# Altium PCB Projekt_Pcb.PcbDoc
Units mm, origin at the board's own origin, x right, y up, seen from the top; angles counter-clockwise.
Board outline 36 x 35 mm, 3 copper layers (Top Layer, GroundPanel, Bottom Layer), stack 0.427 mm thick; 39 components, 31 nets, 164 pads, 44 vias.
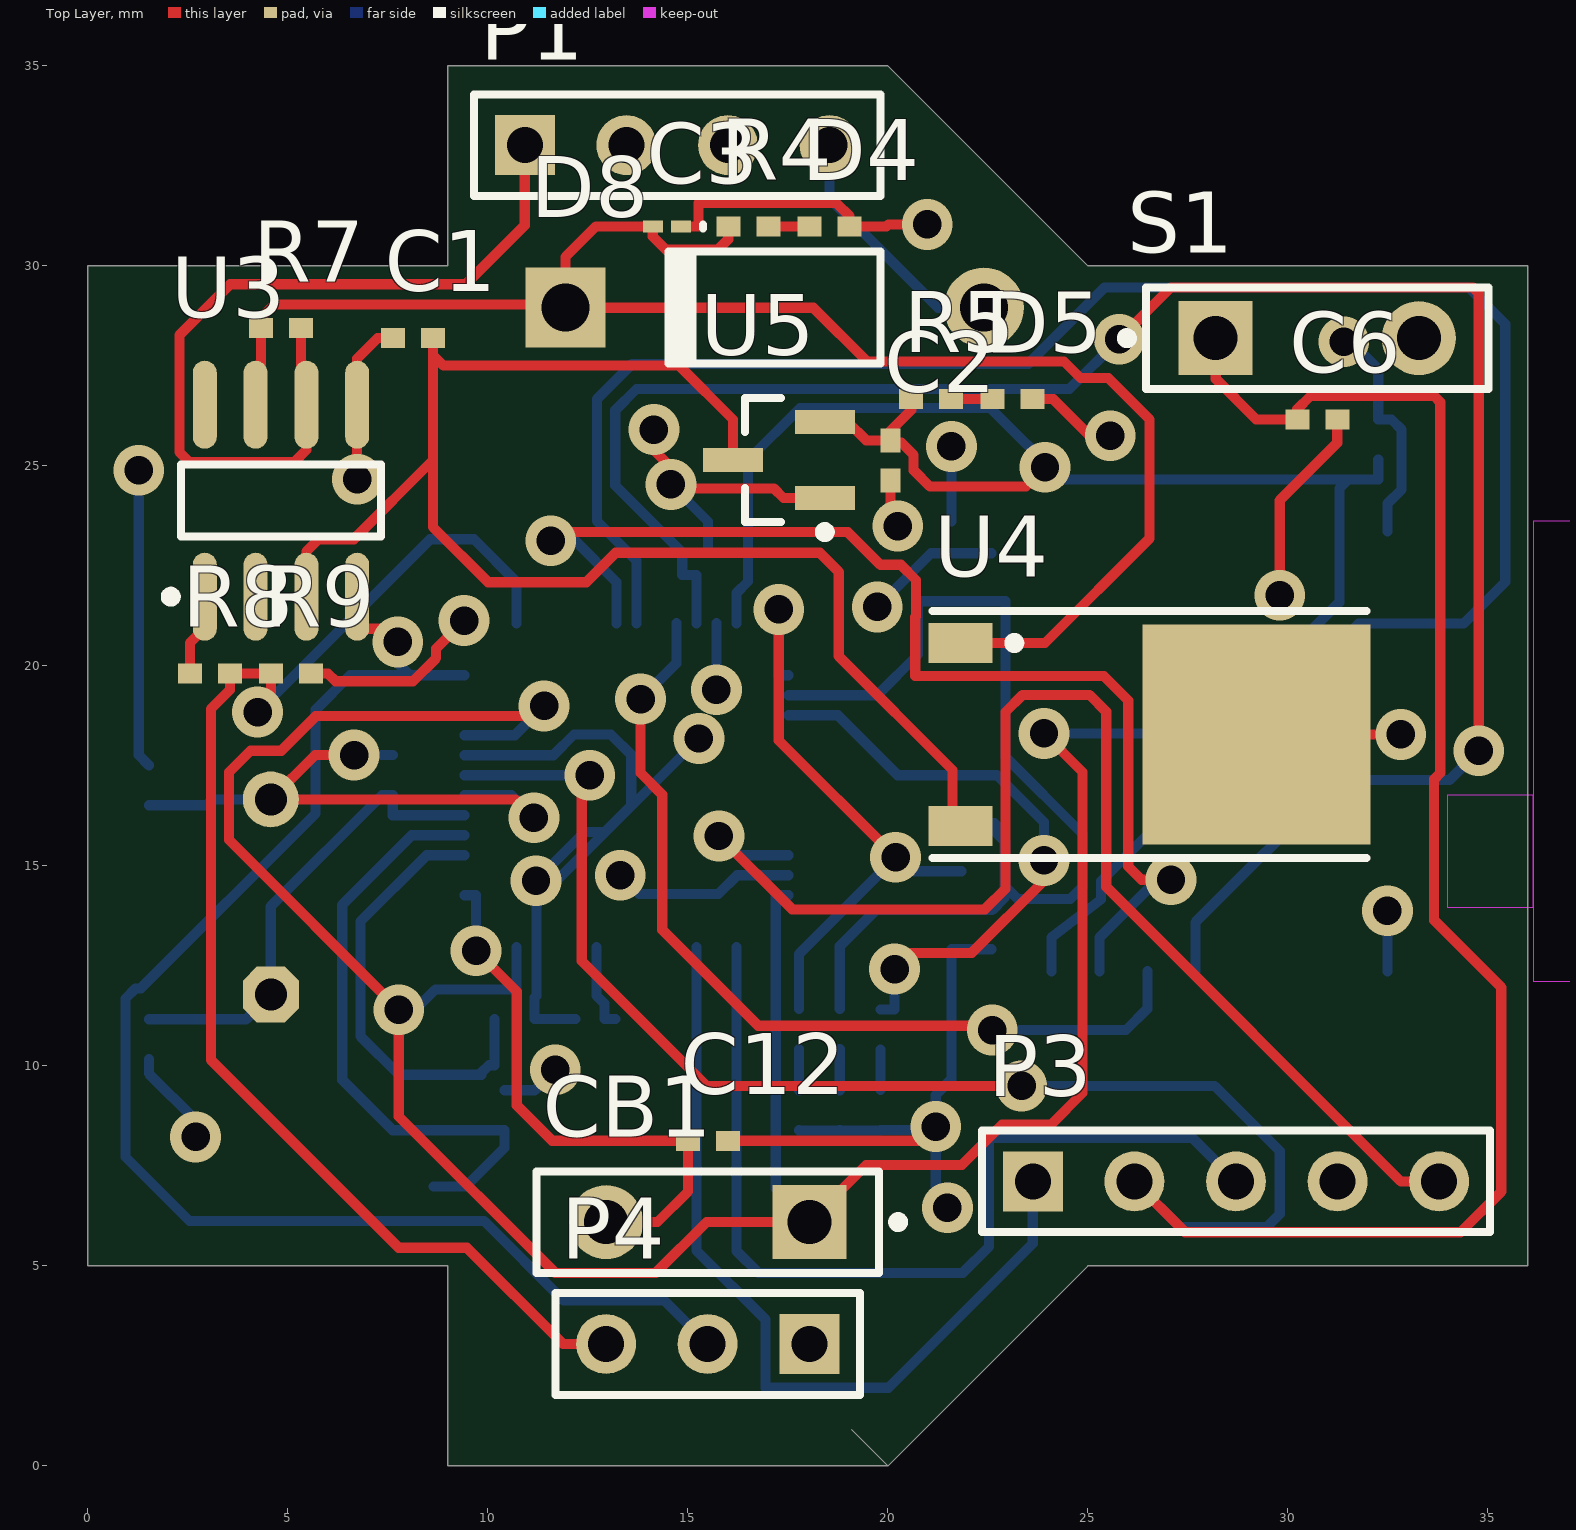
[diagram p0: Top Layer view]
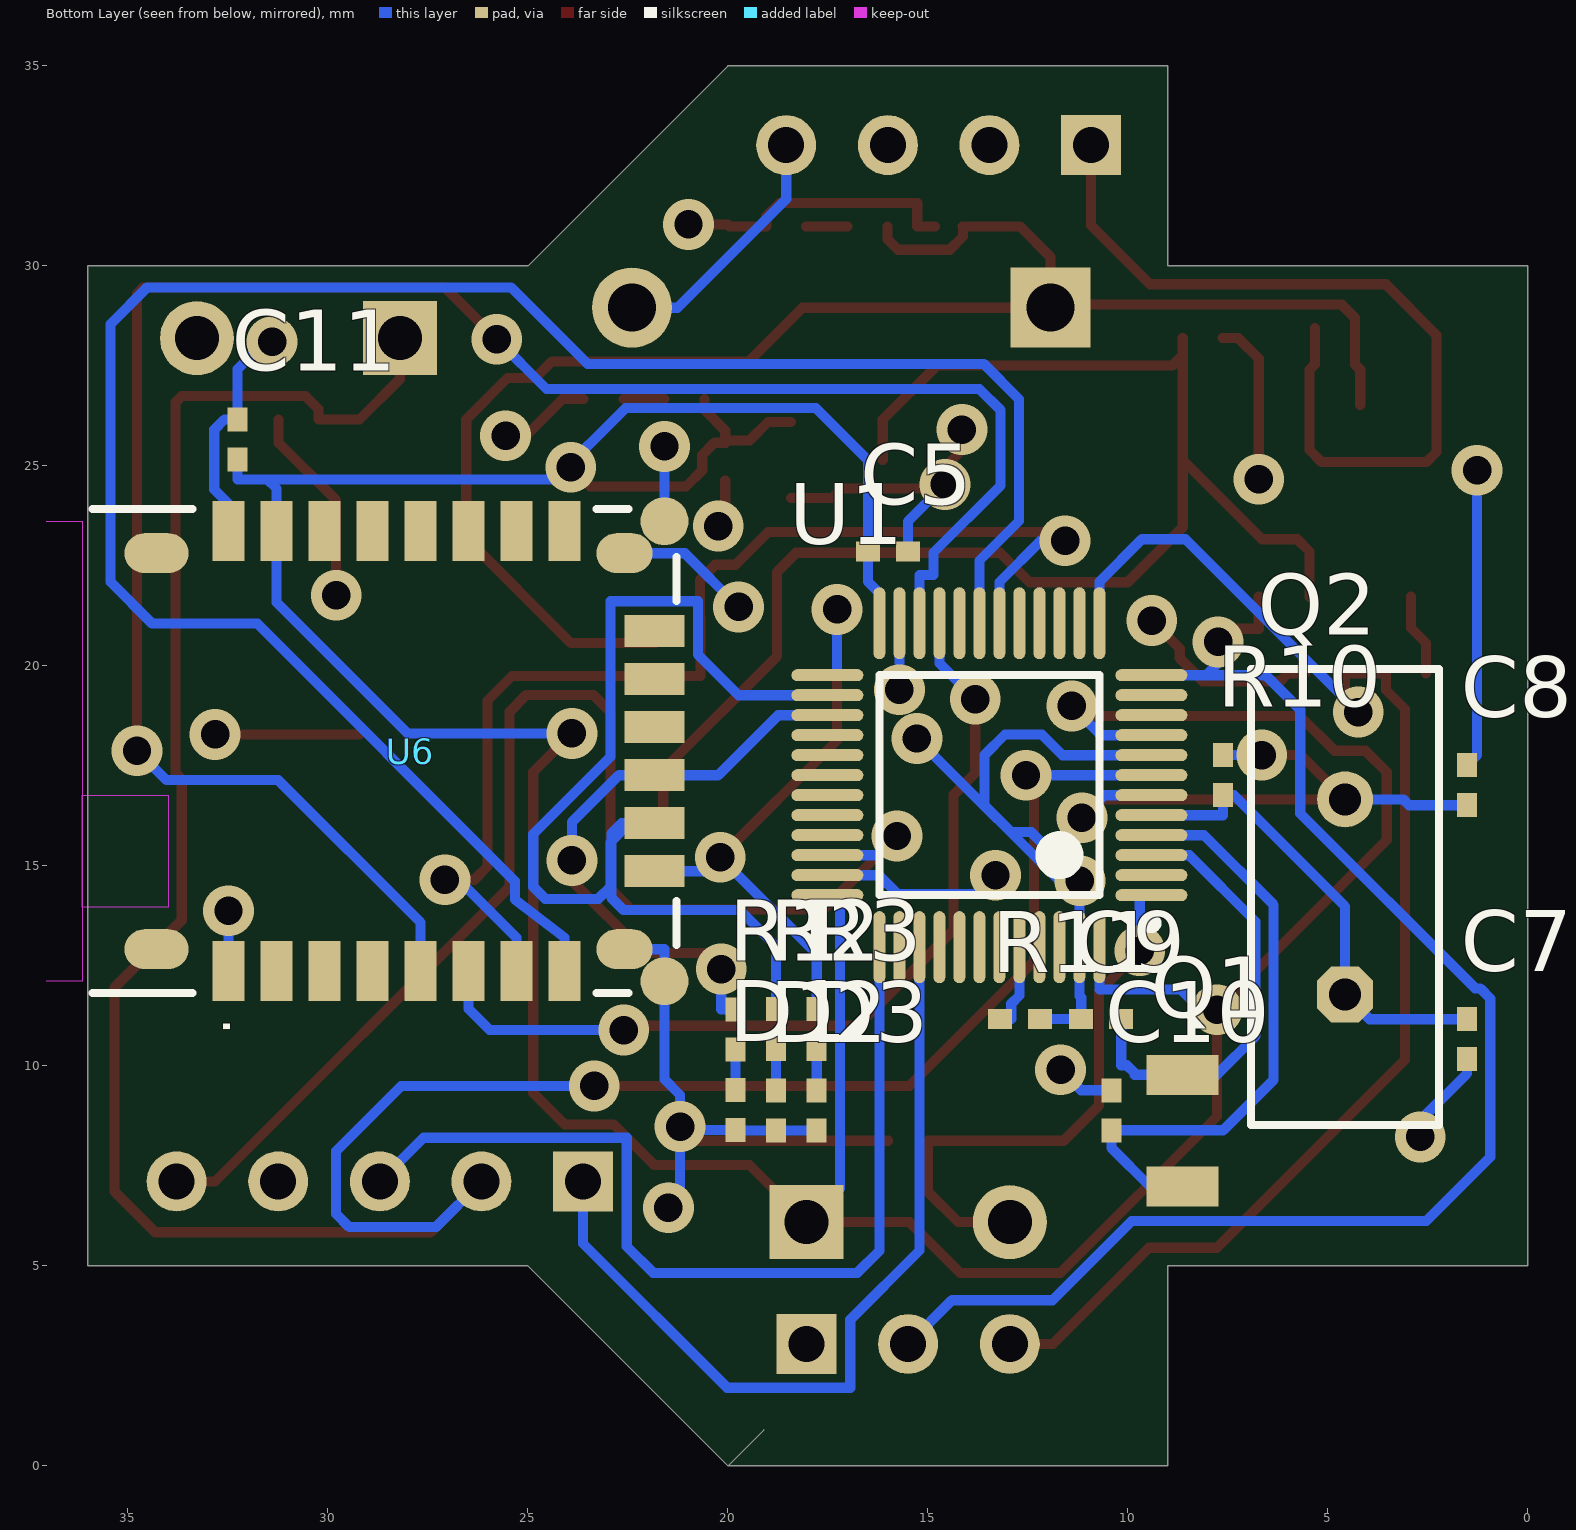
[diagram p1: Bottom Layer view, seen from below]
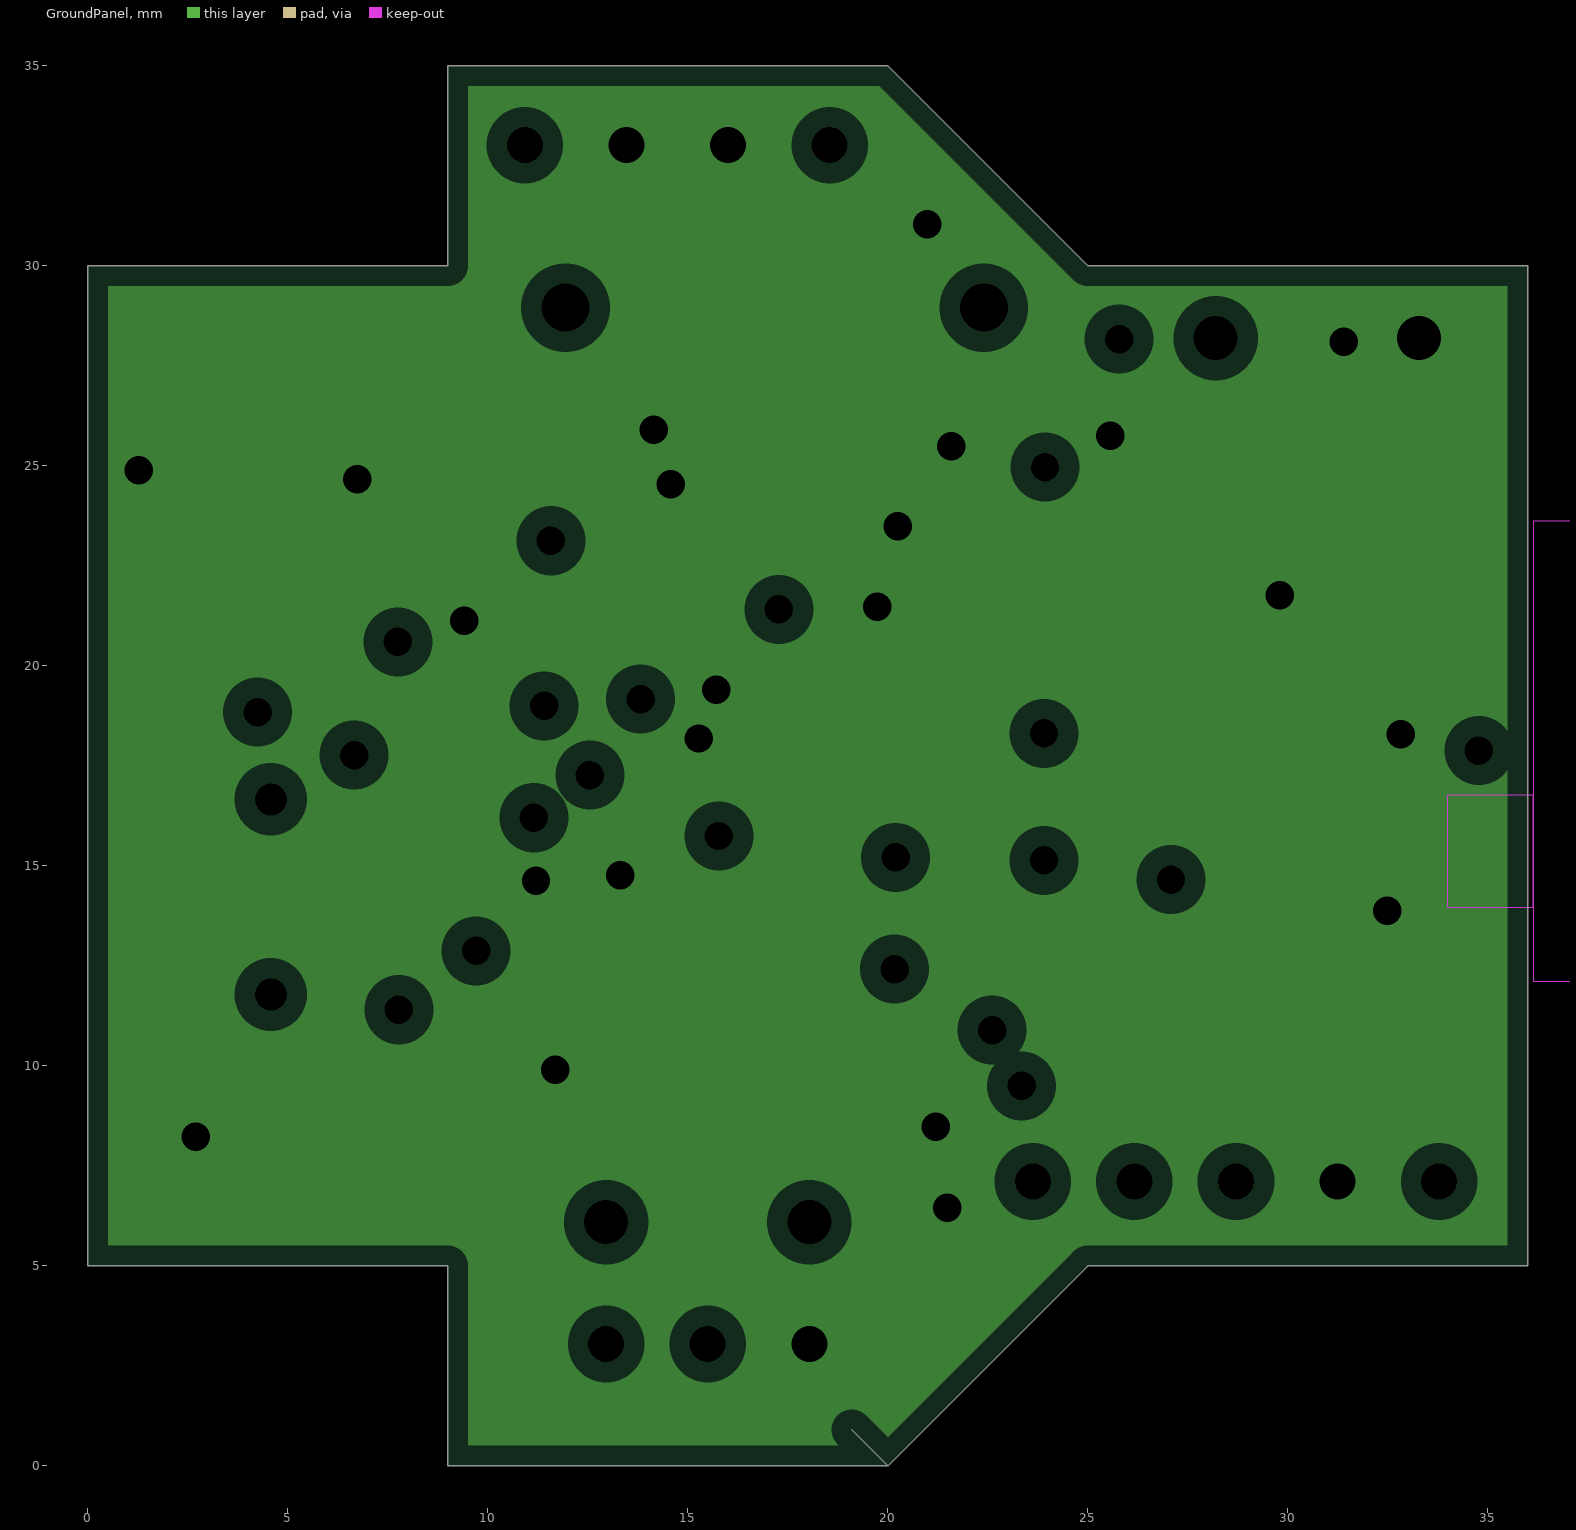
[diagram p2: GroundPanel, clearances drawn from the general rule]

## Layer stack, top to bottom
Top Solder: solder mask 0.0102, Solder Resist, Dk 3.5
Top Layer: signal copper 0.0356
GroundPanel: plane copper 0.036, net GND
Dielectric1: dielectric 0.32, FR-4, Dk 4.8
Bottom Layer: signal copper 0.0356
Bottom Solder: solder mask 0.0102, Solder Resist, Dk 3.5

## Board outline
9,0 9,5 0,5 0,30 9,30 9,35 20,35 25,30 36,30 36,5 25,5 20,0 19.1,0.9 20,0

## Design rules (kind name [scope] priority, off if disabled: settings)
Clearance [All] p1: gap=0.2 ignorepadtopadclearanceinfootprint=TRUE except(0: Arc-Hole Track-Hole SMDPad-Hole THPad-Hole Via-Hole Fill-Hole Poly-Hole Region-Hole Text-Hole)
FabricationTestPointUsage TestPointUsage [All] p1: valid=0 allowmultiple=FALSE
FabricationTestpoint Testpoint [All] p1: side=3 testpointundercomponent=TRUE minsize=1.016 maxsize=2.54 preferedsize=1.524 minholesize=0 maxholesize=1.016 preferedholesize=0.813 testpointgrid=0.025 allowsidetop=TRUE allowsidebottom=TRUE usegrid=TRUE gridtolerance=0
PlaneClearance [All] p1: clearance=0.508
PlaneConnect [All] p1: planeconnectstyle=Relief reliefexpansion=0.508 reliefentries=4 reliefconductorwidth=0.254 reliefairgap=0.254
PolygonConnect [All] p1: connectstyle=Relief reliefconductorwidth=0.254 reliefentries=4 polygonreliefangle="90 Angle" airgapwidth=0.254
RoutingVias [All] p1: holewidth=0.711 width=1.27 viastyle="Through Hole" minholewidth=0.711 minwidth=1.27 maxholewidth=0.711 maxwidth=1.27
SMDNeckDown [All] p1: percent=100.000
SilkToSolderMaskClearance SilkscreenOverComponentPads [IsPad] p1: minsilkscreentomaskgap=0.254 clearancetoexposedcopper=TRUE
SolderMaskExpansion [All] p1: expansion=0.102
Width [All] p1: maxlimit=0.254 minlimit=0.254 preferedwidth=0.254
25 further rules are at their usual default settings.

## Components (designator, comment, footprint, x,y, rotation, side; value= is the part's Value field where it differs from the comment)
C1 "1u" 0402 8.128,28.194 r0 top
C2 "1u" 0402 20.066,25.138 r90 top
C3 "1u" 0603 14.478,30.988 r180 top
C5 "100n" 0402 16.002,22.86 r0 bottom
C6 "100n" 0402 30.734,26.162 r180 top
C7 "22p" 0402 1.524,10.668 r270 bottom
C8 "22p" 0402 1.524,17.018 r90 bottom
C9 "10p" 0402 10.668,11.176 r180 bottom
C10 "10p" 0402 10.414,8.89 r270 bottom
C11 "4.7uF" 0402 32.258,25.662 r90 bottom
C12 "1u" 0402 15.502,8.128 r180 top
CB1 "Circuit Breaker" SPST-2 15.494,6.096 r180 top
D1 "Red" 0402 19.812,8.898 r270 bottom
D2 "Red" 0402 18.796,8.89 r270 bottom
D3 "Red" 0402 17.78,8.89 r270 bottom
D4 "Red" 0402 18.542,30.988 r0 top
D5 "Red" 0402 23.114,26.67 r0 top
D8 "Diode 1N4007" DO-41 17.168,28.956 r180 top
P1 "Header 4" HDR1X4 10.922,33.02 r0 top
P3 "Header 5" HDR1X5 23.622,7.112 r0 top
P4 "Header 3" HDR1X3 18.034,3.048 r180 top
Q1 "32.768kHz" Kwarc 8.636,8.382 r270 bottom
Q2 "8MHz" HC-49U 4.572,14.224 r90 bottom
R1 "330" 0402 19.812,10.914 r90 bottom
R2 "330" 0402 18.796,10.922 r90 bottom
R3 "330" 0402 17.78,10.922 r90 bottom
R4 "330" 0402 16.51,30.988 r180 top
R5 "330" 0402 21.082,26.67 r180 top
R7 "510" 0402 4.826,28.448 r0 top
R8 "12k" 0402 3.048,19.812 r180 top
R9 "22k" 0402 5.08,19.812 r180 top
R10 "1M" 0402 7.62,17.272 r270 bottom
R11 "10k" 0402 12.692,11.176 r180 bottom
S1 "SW-PB" SPST-2 30.734,28.194 r0 top
U1 "STM32F103CBT6" LQFP48_N 13.462,17.018 r0 bottom
U3 "L9637D" SO8_N 4.826,24.13 r90 top
U4 "MC78M05BDTRK" 369A-13 25.51,18.288 r270 top
U5 "MCP1703T-3302E/CB" SOT-23A-CB3_N 17.272,25.146 r180 top
U6 "RN4020-V/RM" RN4020_ALT 32.486,12.368 r90 bottom

## Footprints (in the part's own frame and the unit in brackets; to place one, negate y for a bottom-side part, rotate by r counter-clockwise, add the part's x,y. Pads: shape width x height; smd on the part's side, far side on the other; paste and mask are expansions set on the pad)
369A-13 [mm] "D-PAK/TO-252-AA; 3 Leads (1 Cropped); Body 10.3 (inc. leads) x 6.7 mm (LxW max)"
  rect 1x1.6 smd: 1(-2.285,-3.7) 3(2.285,-3.7)
  rect 5.5x5.7 smd: 4(0,3.7)
  silkscreen extent -3.08,-4.4 3.08,6.45
0402 [mm] "Chip Capacitor, Body 1.0x0.5mm, IPC High Density"
  rect 0.6x0.5 smd: 1(-0.5,0) 2(0.5,0)
  body extent -0.55,-0.3 0.55,0.3, height 1.3
0603 [mm] "Chip Inductor, Body 0.6x0.3mm, IPC High Density"
  rect 0.5x0.3 smd: 1(-0.35,0) 2(0.35,0)
  silkscreen extent -0.9,-0.05 -0.9,0.05, body extent -0.33,-0.18 0.33,0.18, height 0.55
DO-41 [mm] "Diode, Axial; Body 5.2 x 2.7 mm (LxDia. max), Lead Dia. 0.86 mm (max)"
  round 2 hole 1.2: 1(-5.23,0)
  rect 2x2 hole 1.2: 2(5.23,0)
  silkscreen extent -2.65,-1.4 2.75,1.4
HC-49U [mm] "Quartz Crystal, Thru-Hole; 2 Leads; Body 11.35 x 4.65 x 13.46 mm (LxWxH max)"
  oct 1.4x1.4 hole 0.8: 1(-2.44,0)
  round 1.4 hole 0.8: 2(2.44,0)
  silkscreen extent -5.7,-2.35 5.7,2.35
HDR1X3 [mm] "Connector; Header; 3 Position"
  rect 1.5x1.5 hole 0.9: 1(0,0)
  round 1.5 hole 0.9: 2(2.54,0) 3(5.08,0)
  silkscreen extent -1.27,-1.27 6.35,1.27
HDR1X4 [mm] "Connector; Header; 4 Position"
  rect 1.5x1.5 hole 0.9: 1(0,0)
  round 1.5 hole 0.9: 2(2.54,0) 3(5.08,0) 4(7.62,0)
  silkscreen extent -1.27,-1.27 8.89,1.27
HDR1X5 [mm] "Connector; Header; 5 Position"
  rect 1.5x1.5 hole 0.9: 1(0,0)
  round 1.5 hole 0.9: 2(2.54,0) 3(5.08,0) 4(7.62,0) 5(10.16,0)
  silkscreen extent -1.27,-1.27 11.43,1.27
Kwarc [mm] "Chip Inductor, Body 3.2x1.5mm, IPC High Density"
  rect 1x1.8 smd: 1(-1.397,0) 2(1.397,0)
  body extent -1.7,-0.9 1.7,0.9, height 0.55
LQFP48_N [mm] "Thin QFP, 48-Leads, Body 7x7mm, Pitch 0.5mm, IPC Medium Density"
  oval 1.8x0.3 smd: 1(-4.05,2.75) 2(-4.05,2.25) 3(-4.05,1.75) 4(-4.05,1.25) 5(-4.05,0.75) 6(-4.05,0.25) 7(-4.05,-0.25) 8(-4.05,-0.75) 9(-4.05,-1.25) 10(-4.05,-1.75) 11(-4.05,-2.25) 12(-4.05,-2.75) 25(4.05,-2.75) 26(4.05,-2.25) 27(4.05,-1.75) 28(4.05,-1.25) 29(4.05,-0.75) 30(4.05,-0.25) 31(4.05,0.25) 32(4.05,0.75) 33(4.05,1.25) 34(4.05,1.75) 35(4.05,2.25) 36(4.05,2.75)
  oval 0.3x1.8 smd: 13(-2.75,-4.05) 14(-2.25,-4.05) 15(-1.75,-4.05) 16(-1.25,-4.05) 17(-0.75,-4.05) 18(-0.25,-4.05) 19(0.25,-4.05) 20(0.75,-4.05) 21(1.25,-4.05) 22(1.75,-4.05) 23(2.25,-4.05) 24(2.75,-4.05) 37(2.75,4.05) 38(2.25,4.05) 39(1.75,4.05) 40(1.25,4.05) 41(0.75,4.05) 42(0.25,4.05) 43(-0.25,4.05) 44(-0.75,4.05) 45(-1.25,4.05) 46(-1.75,4.05) 47(-2.25,4.05) 48(-2.75,4.05)
  silkscreen extent -4.17,-2.75 2.75,3.57, body extent -3.5,-3.5 3.5,3.5, height 1.6
RN4020_ALT [mm] "Bluetooth BLE Module - Microchip"
  rect 1.5x0.8 smd: 1(0,0) 2(0,-1.2) 3(0,-2.4) 4(0,-3.6) 5(0,-4.8) 6(0,-6) 7(0,-7.2) 8(0,-8.4) 17(11,-8.4) 18(11,-7.2) 19(11,-6) 20(11,-4.8) 21(11,-3.6) 22(11,-2.4) 23(11,-1.2) 24(11,0)
  oval 1x1.6 smd: 1A(0.55,1.8) 24A(10.45,1.8)
  round 1.2 smd: 9(-0.25,-10.9) 16(11.25,-10.9)
  oval 1x1.4 smd: 9(0.55,-9.9) 16(10.45,-9.9)
  rect 0.8x1.5 smd: 10(2.5,-10.65) 11(3.7,-10.65) 12(4.9,-10.65) 13(6.1,-10.65) 14(7.3,-10.65) 15(8.5,-10.65)
  Keep-Out Layer region: 1.6,3.65 4.4,3.65 4.4,1.5 1.6,1.5
  Keep-Out Layer region: -0.25,8.6 11.25,8.6 11.25,3.65 -0.25,3.65
  silkscreen extent -0.55,-11.2 11.55,3.4, body extent -0.25,-10.9 11.25,8.6, height 2.3
SO8_N [mm] "SOIC, 8-Leads, Body 4.9x3.9mm, Pitch 1.27mm, IPC Medium Density"
  oval 2.2x0.6 smd: 1(-2.4,1.905) 2(-2.4,0.635) 3(-2.4,-0.635) 4(-2.4,-1.905) 5(2.4,-1.905) 6(2.4,-0.635) 7(2.4,0.635) 8(2.4,1.905)
  silkscreen extent -2.52,-2.5 0.9,2.88, body extent -1.95,-2.45 1.95,2.45, height 1.75
SOT-23A-CB3_N [mm] "SOT346, 3-Leads, Body 2.9x1.5mm, Pitch 0.95mm, Lead Span 2.6mm, IPC Medium Density"
  rect 1.5x0.6 smd: 1(-1.15,0.95) 2(-1.15,-0.95) 3(1.15,0)
  silkscreen extent -1.28,-1.55 0.85,1.92, body extent -0.85,-1.55 0.85,1.55, height 1.45
SPST-2 [mm] "Switch; 2 Leads"
  rect 1.85x1.85 hole 1.1: 1(-2.54,0)
  round 1.85 hole 1.1: 2(2.54,0)
  silkscreen extent -4.89,-1.27 4.28,1.27

## Part data
C1 C2 C3 C5 C6 C7 C8 C9 C10 C11 C12: library part Cap, "Capacitor", LatestRevisionDate=17-Jul-2002, LatestRevisionNote="Re-released for DXP Platform.", PackageDescription="Radial Cap, Thru-Hole; 2 Leads; 0.3 in Pin Spacing", PackageReference=RAD-0.3, Published=8-Jun-2000, Publisher="Altium Limited"
D1 D2 D3 D4 D5: library part LED2, "Typical RED, GREEN, YELLOW, AMBER GaAs LED", LatestRevisionDate=17-Jul-2002, LatestRevisionNote="Re-released for DXP Platform.", PackageDescription="SM LED; 2 Flat Leads", PackageReference=3.2X1.6X1.1, PackageVersion=Feb-2002, Published=8-Jun-2000, Publisher="Altium Limited"
D8: "1 Amp General Purpose Rectifier", Code_JEDEC=DO-204-AL, ComponentLink1Description="Manufacturer Link", ComponentLink1URL=http://www.fairchildsemi.com/, ComponentLink2Description=Datasheet, ComponentLink2URL=http://www.fairchildsemi.com/ds/1N%2F1N4001.pdf, DatasheetVersion=1998, LatestRevisionDate=17-Jul-2002, LatestRevisionNote="Re-released for DXP Platform.", PackageDescription="Diode, Axial; Body 5.2 x 2.7 mm (LxDia. max), Lead Dia. 0.86 mm (max)", PackageReference=DO-41, PackageVersion=Aug-1999, Published=8-Jun-2000, Publisher="Altium Limited"
P1: "Header, 4-Pin", LatestRevisionDate=17-Jul-2002, LatestRevisionNote="Re-released for DXP Platform.", Publisher="Altium Limited"
P3: "Header, 5-Pin", LatestRevisionDate=17-Jul-2002, LatestRevisionNote="Re-released for DXP Platform.", Publisher="Altium Limited"
P4: "Header, 3-Pin", LatestRevisionDate=17-Jul-2002, LatestRevisionNote="Re-released for DXP Platform.", Publisher="Altium Limited"
Q1: library part XTAL, "Crystal Oscillator", LatestRevisionDate=17-Jul-2002, LatestRevisionNote="Re-released for DXP Platform.", PackageDescription="Crystal, Thru-Hole; 2 Leads; Body 3.1 x 8.2 mm (Dia.xH)", PackageReference=R38, Published=8-Jun-2000, Publisher="Altium Limited"
Q2: library part ECS-10-13-1, "Crystal Oscillator", ComponentLink1Description="Manufacturer Link", ComponentLink1URL=http://www.ecsxtal.com/, ComponentLink2Description=Datasheet, ComponentLink2URL=http://www.ecsxtal.com/pdf2/HC49U.PDF, DatasheetDocument=18-Apr-2000, PackageReference=HC-49U, Published=17-Jul-2002, Publisher="Altium Limited"
R1 R2 R3 R4 R5 R7 R8 R9 R10 R11: library part Res2, "Resistor", LatestRevisionDate=17-Jul-2002, LatestRevisionNote="Re-released for DXP Platform.", PackageDescription="Axial Device, Thru-Hole; 2 Leads; 0.4 in Pin Spacing", PackageReference=AXIAL-0.4, Published=8-Jun-2000, Publisher="Altium Limited"
S1: "Switch", LatestRevisionDate=17-Jul-2002, LatestRevisionNote="Re-released for DXP Platform.", PackageDescription="Switch; 2 Leads", PackageReference=SPST-2, Published=24-Mar-1999, Publisher="Altium Limited"
U1: "STM32 ARM-based 32-bit MCU with 128 Kbytes Flash, 48-pin LQFP, Industrial Temperature", ComponentLink1Description="Manufacturer Link", ComponentLink1URL=www.st.com/stm32, ComponentLink2Description=Datasheet, ComponentLink2URL=http://www.st.com/stonline/products/literature/ds/13587.pdf, DatasheetVersion="rev6, Mar-2008", PackageDescription="48-Pin Low-Profile Quad Flat Pack, 7 x 7 mm Body, 0.5 mm Pitch (LQFP48)", PackageReference=LQFP48, PackageVersion=Mar-2008, Published=30-May-2008, Publisher="Altium Limited"
U3: "ISO 9141 Interface", Code_IPC=SOIC127P600-8, Code_JEDEC=MS-012-AA, ComponentLink1Description="Manufacturer Link", ComponentLink1URL=http://www.st.com/, ComponentLink2Description=Datasheet, ComponentLink2URL=http://www.st.com/stonline/products/literature/ds/1765/l9637.pdf, DatasheetVersion=Dec-1998, LatestRevisionDate=13-Apr-2006, LatestRevisionNote="IPC-7351 Footprint Added.", PackageDescription="8-Pin Small Outline Integrated Circuit 1.27 mm Pitch", PackageReference=SO8, PackageVersion=Dec-2002, Published=24-Aug-2001, Publisher="Altium Limited"
U4: "Three-Terminal Medium Current Positive Voltage Regulator", ComponentLink1Description="Manufacturer Link", ComponentLink1URL=http://www.onsemi.com/site/products/taxonomy/0,4438,503,00.html, ComponentLink2Description=Datasheet, ComponentLink2URL=http://www.onsemi.com/pub/Collateral/MC78M00-D.PDF, DatasheetVersion=Apr-2000, Note="Pin 2 is electrically connected to Pin 4; Pin 2 is trimmed and not drawn;", PackageDescription="D-PAK/TO-252-AA; 3 Leads (1 Cropped); Body 10.3 (inc. leads) x 6.7 mm (LxW max)", PackageReference=369A-13, PackageVersion=1997, Published=15-Apr-2002, Publisher="Altium Limited"
U5: "250 mA, 16V, Low Quiescent Current LDO Regulator, 3-Pin SOT-23A, Extended Temperature, Tape and Reel", Supplier Part Number 1=MCP1703T-3302E/CBTR-ND, ComponentLink1Description=Datasheet, ComponentLink1URL=http://ww1.microchip.com/downloads/en/DeviceDoc/22049d.pdf, ComponentLink2Description="Packaging Specification", ComponentLink2URL=http://www.microchip.com/stellent/groups/techpub_sg/documents/packagingspec/en012702.pdf, ComponentLink3Description="Microchip.com Home", ComponentLink3URL=http://www.microchip.com/, DatasheetVersion="revD, Sep-2009", PackageDescription="3-Lead Plastic Small Outline Transistor (CB) [SOT-23A]", PackageReference=SOT-23A-CB3, PackageVersion="revBB, Aug-2009", Published=29-Jan-2009, Publisher="Altium Limited", Supplier 1=Digi-Key, Supplier 2=Digi-Key, Supplier 3=Digi-Key, Supplier 4=Farnell, Supplier Part Number 2=MCP1703T-3302E/CBCT-ND, Supplier Part Number 3=MCP1703T-3302E/CBDKR-ND, Supplier Part Number 4=1439518
U6: library part RN2020-V/RM123, "Microchip RN4020 Bluetooth"
CB1: LatestRevisionDate=17-Jul-2002, LatestRevisionNote="Re-released for DXP Platform.", PackageDescription="Switch; 2 Leads", PackageReference=SPST-2, Published=24-Mar-1999, Publisher="Altium Limited"

## Via types
v1: diameter 1.27, hole 0.711, Top Layer to Bottom Layer, 44 vias

## Nets (pads, with @x,y where several pads share a name; then routed paths per layer and width w, separated by ;. In a path a pad name is that pad's centre, name@x,y a point inside that pad or via, vN(x,y) a via of type N, cw(c..) or ccw(c..) an arc to the next point about the centre after c; other vN are vias at no path point)
3.3V: C2.2 C5.2 C11.1 CB1.1 R5.2 U1.9 U1.24 U1.36 U1.48 U5.2 U6.23 | length 106.5
  Top Layer w0.254: v1(11.405,18.999) 11.151,18.745 5.697,18.745 4.833,17.881 4.064,17.881 3.531,17.348 3.531,15.646 v1(7.772,11.405) 7.772,8.738 11.684,4.826 14.199,4.826 15.469,6.096 CB1.1 19.46,7.522 21.844,7.522 22.857,8.534 24.079,8.534 24.867,9.322 24.867,17.348 v1(23.901,18.313) ; U5.2 18.999,26.096 19.457,25.638 C2.2 ; R5.2 20.582,26.399 20.066,25.883 C2.2 ; v1(23.927,24.968) 23.444,24.486 21.049,24.486 20.643,24.892 20.643,25.273 20.338,25.578 20.066,25.578 C2.2
  Bottom Layer w0.254: v1(7.772,11.405) 8.179,11.405 8.687,11.913 10.712,11.913 U1.48 ; U1.9 10.673,18.268 v1(11.405,18.999) ; U1.24 16.212,21.819 16.502,22.109 C5.2 16.502,25.146 17.806,26.45 22.555,26.45 v1@24.342,24.663 ; U1.36 17.196,14.268 17.196,6.934 CB1.1 ; v1(23.901,18.313) 28.009,18.313 31.286,21.59 U6.23 31.286,24.435 31.515,24.663 ; v1(23.927,24.968) 23.927,24.663 v1@24.342,24.663 ; C11.1 32.258,24.663 31.515,24.663 ; v1@24.342,24.663 31.515,24.663
12V: D8.1 P1.4 | length 6.3
  Bottom Layer w0.254: P1.4 18.542,31.674 21.26,28.956 D8.1
GND: C1.1 C2.1 C3.1 C5.1 C6.1 C7.2 C8.2 C9.1 C10.1 C11.2 C12.1 D1.2 D2.2 D3.2 D4.2 D5.2 P1.2 P1.3 P3.4 P4.1 R9.1 R11.2 S1.2 U1.8 U1.23 U1.35 U1.47 U3.5 U4.4 U5.1 U6.1 U6.9 U6.16 U6.24 | length 101.5
  Top Layer w0.254: R9.1 5.998,19.812 6.192,19.618 8.128,19.618 8.704,20.194 8.704,20.434 v1(9.403,21.133) ; v1(6.731,24.668) U3.5 6.731,27.686 7.239,28.194 C1.1 ; v1(14.149,25.908) 14.149,25.4 15.111,24.438 17.147,24.438 17.389,24.196 U5.1 ; C3.1 15.265,30.988 15.265,31.572 18.712,31.572 19.042,31.242 D4.2 19.962,30.988 20.013,31.039 v1(20.985,31.039) ; C12.1 20.841,8.128 v1(21.197,8.484) ; C2.1 20.066,23.673 v1(20.244,23.495) ; D5.2 24.135,26.67 25.049,25.756 v1(25.557,25.756) ; U4.4 v1(32.822,18.288) ; v1(29.794,21.768) 29.794,24.138 31.234,25.578 C6.1
  Bottom Layer w0.254: v1(1.27,24.892) 1.27,17.772 C8.2 ; C7.2 1.524,9.807 2.692,8.638 v1(2.692,8.225) ; U1.8 11.636,17.768 12.153,18.285 13.075,18.285 13.583,17.777 13.583,16.51 12.917,15.844 12.415,15.844 v1(11.201,14.63) ; C10.1 11.168,9.39 v1(11.684,9.906) ; R11.2 C9.1 11.168,11.709 11.212,11.753 U1.47 11.212,14.122 v1(15.276,18.186) ; v1(13.31,14.768) 13.782,14.296 15.758,14.296 16.23,14.768 U1.35 ; v1(14.575,24.536) 15.502,23.609 C5.1 ; v1(15.712,19.406) U1.23 ; D3.2 17.78,8.382 D2.2@18.796,8.382 ; D2.2 D2.2@18.796,8.382 ; v1(19.735,21.475) 21.078,22.818 U6.16@22.586,22.818 ; v1@21.488,6.963 v1(21.488,6.455) 21.197,6.746 v1(21.197,8.484) ; U6.16@21.586,23.618 v1(21.586,25.488) ; U6.9@22.586,12.918 21.586,12.918 21.586,12.118 21.586,9.664 21.197,9.275 v1(21.197,8.484) ; v1(31.394,28.105) 31.578,28.105 32.258,27.425 C11.2 32.588,26.162 32.842,25.908 32.842,24.41 32.486,24.054 U6.24 ; U6.1 v1(32.486,13.88) ; D2.2@18.796,8.382 19.812,8.382 D1.2 21.111,8.398 v1(21.197,8.484)
"ISO9141-2 K": P1.1 R7.2 U3.6 | length 21.2
  Top Layer w0.254: R7.2 5.326,27.542 5.461,27.407 U3.6 5.461,25.4 5.156,25.095 2.54,25.095 2.286,25.349 2.286,28.27 3.556,29.54 9.449,29.54 10.922,31.013 P1.1
NetC1_2: C1.2 U3.3 U4.3 U5.3 | length 38.1
  Top Layer w0.254: U3.3 5.461,22.86 5.766,23.165 6.647,23.165 8.628,25.146 ; C1.2 8.628,27.77 ; U5.3 16.129,25.146 16.129,26.162 14.783,27.508 8.89,27.508 8.628,27.77 ; U4.3 21.615,16.003 21.615,17.4 18.771,20.245 18.771,22.352 18.294,22.828 13.197,22.828 12.459,22.09 10.007,22.09 8.628,23.47 8.628,25.146 ; 8.628,25.146 8.628,27.77
NetC3_2: C3.2 D8.2 R4.2 R7.1 U3.7 U4.1 | length 41
  Top Layer w0.254: U3.7 4.191,27.407 4.326,27.542 R7.1 4.326,28.702 4.656,29.032 D8.2@11.938,29.032 ; C3.2 C3.2@14.122,30.988 ; R4.2 16.01,30.666 15.748,30.404 14.453,30.404 14.122,30.734 C3.2@14.122,30.988 ; U4.1 23.927,20.573 26.543,23.189 26.543,26.162 25.509,27.196 24.815,27.196 24.401,27.61 19.482,27.61 18.136,28.956 D8.2 D8.2@11.938,29.032 ; D8.2@11.938,29.032 11.938,30.226 12.7,30.988 C3.2@14.122,30.988
NetC7_1: C7.1 Q2.1 R10.2 U1.5 | length 12
  Bottom Layer w0.254: C7.1 3.956,11.168 Q2.1 4.572,13.989 7.355,16.772 R10.2 7.62,16.268 U1.5
NetC8_1: C8.1 Q2.2 R10.1 U1.6 | length 15.4
  Top Layer w0.254: v1(6.655,17.772) 5.68,17.772 Q2.2 10.692,16.664 v1(11.151,16.205)
  Bottom Layer w0.254: C8.1 2.972,16.518 3.118,16.664 Q2.2 ; v1(6.655,17.772) R10.1 ; U1.6 10.588,16.768 v1(11.151,16.205)
NetC9_2: C9.2 Q1.1 U1.3 | length 11.2
  Bottom Layer w0.254: U1.3 8.467,15.268 6.81,13.611 6.81,10.744 7.776,9.779 Q1.1 9.837,9.779 9.837,9.825 10.029,10.017 10.168,10.017 C9.2
NetC10_2: C10.2 Q1.2 U1.4 | length 15.3
  Bottom Layer w0.254: Q1.2 9.449,6.985 10.414,7.95 C10.2 7.62,8.39 6.356,9.654 6.356,14.027 8.097,15.768 U1.4
NetC12_2: C12.2 CB1.2 U1.1 | length 14.2
  Top Layer w0.254: v1(9.703,12.878) 10.719,11.862 10.719,9.017 11.608,8.128 C12.2 15.002,6.858 14.24,6.096 CB1.2
  Bottom Layer w0.254: U1.1 9.703,14.268 v1(9.703,12.878)
NetD1_1: D1.1 R1.1 | length 1
  Bottom Layer w0.254: D1.1 R1.1
NetD2_1: D2.1 R2.1 | length 1
  Bottom Layer w0.254: D2.1 R2.1
NetD3_1: D3.1 R3.1 | length 1
  Bottom Layer w0.254: D3.1 R3.1
NetD4_1: D4.1 R4.1 | length 1
  Top Layer w0.254: R4.1 D4.1
NetD5_1: D5.1 R5.1 | length 1
  Top Layer w0.254: R5.1 D5.1
NetP3_1: P3.1 U1.39 | length 21.5
  Bottom Layer w0.254: U1.39 15.212,5.387 16.942,3.658 16.942,1.956 20.015,1.956 23.622,5.563 P3.1
NetP4_2: P4.2 U1.12 U3.4 | length 36.7
  Top Layer w0.254: U3.4 6.731,20.93 7.417,20.93 v1(7.747,20.599)
  Bottom Layer w0.254: v1(7.747,20.599) 7.747,20.066 8.045,19.768 ; U1.12 8.045,19.768 ; P4.2 14.402,4.14 11.887,4.14 9.906,6.121 2.54,6.121 0.94,7.722 0.94,11.684 1.194,11.938 1.321,11.938 5.693,16.31 5.693,18.908 6.553,19.768 8.045,19.768
NetP4_3: P4.3 R8.1 R9.2 U1.13 | length 34.6
  Top Layer w0.254: v1(4.242,18.847) 4.58,19.185 R9.2 R8.1 3.548,19.398 3.073,18.923 3.073,10.153 7.772,5.454 9.474,5.454 11.88,3.048 P4.3
  Bottom Layer w0.254: v1(4.242,18.847) 8.56,23.165 9.652,23.165 10.712,22.105 U1.13
NetR8_2: R8.2 U3.1 | length 2.1
  Top Layer w0.254: R8.2 2.548,20.574 2.921,20.947 U3.1
NetR11_1: R11.1 U1.44 | length 2.2
  Bottom Layer w0.254: U1.44 12.712,11.76 12.915,11.557 12.915,11.176 R11.1
NetU1_18: U1.18 U6.7 | length 29.4
  Top Layer w0.254: v1(11.572,23.129) 11.788,23.345 18.997,23.345 19.812,22.53 20.32,22.53 20.701,22.149 20.701,21.234 20.683,21.216 20.683,19.746 25.399,19.746 26.01,19.135 26.01,14.986 26.34,14.656 v1(27.076,14.656)
  Bottom Layer w0.254: v1(11.572,23.129) 12.181,23.129 13.212,22.098 U1.18 ; U6.7 25.286,13.208 26.734,14.656 v1(27.076,14.656)
NetU1_19: U1.19 U6.8 | length 52.8
  Bottom Layer w0.254: U1.19 13.712,22.635 12.725,23.622 12.725,26.67 13.605,27.55 23.509,27.55 25.423,29.464 34.519,29.464 35.433,28.55 35.433,22.098 34.392,21.057 31.763,21.057 25.327,14.621 25.327,14.157 24.086,13.208 U6.8
NRST: C6.2 P3.2 S1.1 U1.7 | length 71.2
  Top Layer w0.254: v1(12.548,17.268) 12.344,17.065 12.344,12.624 15.469,9.5 v1(23.343,9.5) ; P3.2 27.432,5.842 34.315,5.842 35.331,6.858 35.331,11.963 33.655,13.64 33.655,17.17 33.807,17.323 33.807,26.594 33.655,26.746 30.564,26.746 30.234,26.416 C6.2 29.21,26.162 28.194,27.178 S1.1
  Bottom Layer w0.254: U1.7 v1(12.548,17.268) ; v1(23.343,9.5) 28.169,9.5 29.794,7.874 29.794,6.299 29.464,5.969 27.305,5.969 P3.2
PIO1: R3.2 U1.25 U6.10 | length 16.1
  Top Layer w0.254: v1(17.272,21.412) 17.272,18.136 v1(20.193,15.215)
  Bottom Layer w0.254: v1(17.272,21.412) 17.272,19.768 U1.25 ; R3.2 17.78,12.802 v1@19.846,14.868 ; v1(20.193,15.215) v1@19.846,14.868 ; U6.10 v1@19.846,14.868
PIO2: R2.2 U1.26 U6.11 | length 28.1
  Bottom Layer w0.254: U1.26 19.736,19.268 20.752,20.284 20.752,21.615 22.936,21.615 22.936,17.729 24.867,15.799 24.867,14.478 24.565,14.176 23.238,14.176 22.937,14.478 22.937,15.598 22.914,15.62 ; R2.2 18.796,12.991 19.699,13.894 22.606,13.894 22.914,14.202 22.914,15.62 ; U6.11 U6.11@22.466,16.068 ; U6.11@22.466,16.068 22.657,16.068 22.914,15.811 22.914,15.62 ; U6.11@22.466,16.068 22.914,15.62
PIO3: R1.2 U1.27 U6.12 | length 15
  Top Layer w0.254: v1(20.168,12.421) 20.574,12.827 22.098,12.827 23.901,14.63 v1(23.901,15.138)
  Bottom Layer w0.254: U1.27 18.745,18.768 20.245,17.268 U6.12 22.726,17.268 23.901,16.092 v1(23.901,15.138) ; R1.2 20.168,11.414 v1(20.168,12.421)
SWCLK: P3.3 U1.37 | length 23.8
  Bottom Layer w0.254: U1.37 16.212,5.378 16.764,4.826 21.869,4.826 22.53,5.486 22.53,8.204 27.61,8.204 P3.3
SWDIO: P3.5 U1.34 | length 33.1
  Top Layer w0.254: v1(15.773,15.748) 17.607,13.914 22.423,13.914 22.939,14.43 22.939,18.847 23.368,19.275 25.038,19.275 25.458,18.856 25.458,14.478 32.824,7.112 P3.5
  Bottom Layer w0.254: v1(15.773,15.748) 16.253,15.268 U1.34
UART1_RX_STM: U1.22 U6.5 | length 50.8
  Top Layer w0.254: v1(25.781,28.169) 27.076,29.464 34.62,29.464 34.773,29.312 v1(34.773,17.882)
  Bottom Layer w0.254: U1.22 15.212,22.276 14.859,22.276 14.859,22.835 13.183,24.511 13.183,26.391 13.716,26.924 24.536,26.924 v1(25.781,28.169) ; U6.5 27.686,13.589 31.242,17.145 34.036,17.145 v1(34.773,17.882)
UART1_TX_STM: U1.21 U6.6 | length 22.6
  Top Layer w0.254: v1(13.818,19.172) 13.818,17.323 14.357,16.783 14.357,13.405 16.758,11.005 22.498,11.005 v1(22.606,10.897)
  Bottom Layer w0.254: v1(13.818,19.172) 14.712,20.066 U1.21 ; v1(22.606,10.897) 25.953,10.897 26.486,11.43 U6.6
pads on no net: U1.2 U1.10 U1.11 U1.14 U1.15 U1.16 U1.17 U1.20 U1.28 U1.29 U1.30 U1.31 U1.32 U1.33 U1.38 U1.40 U1.41 U1.42 U1.43 U1.45 U1.46 U3.2 U3.8 U6.1A U6.2 U6.3 U6.4 U6.13 U6.14 U6.15 U6.17 U6.18 U6.19 U6.20 U6.21 U6.22 U6.24A

## Polygon pours and split planes (outlines as drawn)
GND on GroundPanel (split plane): 24.639,29.639 24.716,29.576 24.805,29.528 24.9,29.499 25,29.49 35.49,29.49 35.49,5.51 25,5.51 24.9,5.501 24.805,5.472 24.716,5.424 24.639,5.361 20,0.722 19.461,1.261 19.384,1.324 19.295,1.372 19.2,1.401 19.1,1.41 19,1.401 18.905,1.372 18.816,1.324 18.739,1.261 18.676,1.184 18.628,1.095 18.599,1 18.59,0.9 18.599,0.8 18.628,0.705 18.676,0.616 18.739,0.539 18.768,0.51 9.51,0.51 9.51,5 9.501,5.1 9.472,5.195 9.424,5.284 9.361,5.361 9.284,5.424 9.195,5.472 9.1,5.501 9,5.51 0.51,5.51 0.51,29.49 9,29.49 9.1,29.499 9.195,29.528 9.284,29.576 9.361,29.639 9.424,29.716 9.472,29.805 9.501,29.9 9.51,30 9.51,34.49 19.789,34.49

## Silkscreen, mask and mechanical layers (free items; w line width, h text height)
Mechanical 16:
  drawing of 1874 lines, arcs and shapes, not listed
  text "1" at -29.286,135.509 h1.78
  text "2" at 43.358,135.509 h1.78
  text "3" at 116.51,135.509 h1.78
  text "4" at 189.408,135.509 h1.78
  text "A" at -63.627,112.497 h1.78
  text "A" at 223.393,112.497 h1.78
  text "B" at -63.627,64.44 h1.78
  text "B" at 223.393,64.44 h1.78
  text "C" at -63.627,15.926 h1.78
  text "ENGINEER:" at 108.458,-21.082 h1.14
  text "TITLE:" at 146.558,-21.082 h1.14
  text "PCB DESIGNER:" at 108.458,-28.575 h1.14
  text "D" at -63.627,-32.08 h1.78
  text "D" at 223.393,-32.08 h1.78
  text "DATE:" at 108.458,-36.322 h1.14
  text "PART NO.:" at 146.558,-36.322 h1.14
  text "REV:" at 199.898,-36.322 h1.14
  text "C" at 8.293,-37.351 h1.78
  text "Altium Limited" at 75.438,-38.862 h1.78
  text ".PRINT_DATE" at 109.728,-39.37 h1.78
  text "12a Rodborough Rd" at 75.438,-41.402 h1.78
  text "Frenchs Forest" at 75.438,-43.942 h1.78
  text "FILE NAME:" at 108.458,-43.942 h1.14
  text "DWG NO:" at 146.558,-43.942 h1.14
  text "SCALE:" at 199.898,-43.942 h1.14
  text "NSW 2086" at 75.438,-46.482 h1.78
  text ".PCB_FILE_NAME_NO_PATH" at 109.728,-46.99 h1.78
  text "1" at -29.286,-52.451 h1.78
  text "2" at 43.358,-52.451 h1.78
  text "3" at 116.51,-52.451 h1.78
  text "4" at 189.408,-52.451 h1.78

## Text inside footprints (layer, text, board x,y; h text height)
U6: Mechanical 11 "1" at 32.586,13.718 h1 r270